# Altium PCB 5VV10 AND BUCK_v3_SKM.PcbDoc
Units mm, origin at the board's own origin, x right, y up, seen from the top; angles counter-clockwise.
Board outline 110 x 110 mm, 2 copper layers (Top Layer, Bottom Layer); 23 components, 22 nets, 89 pads, 12 vias.
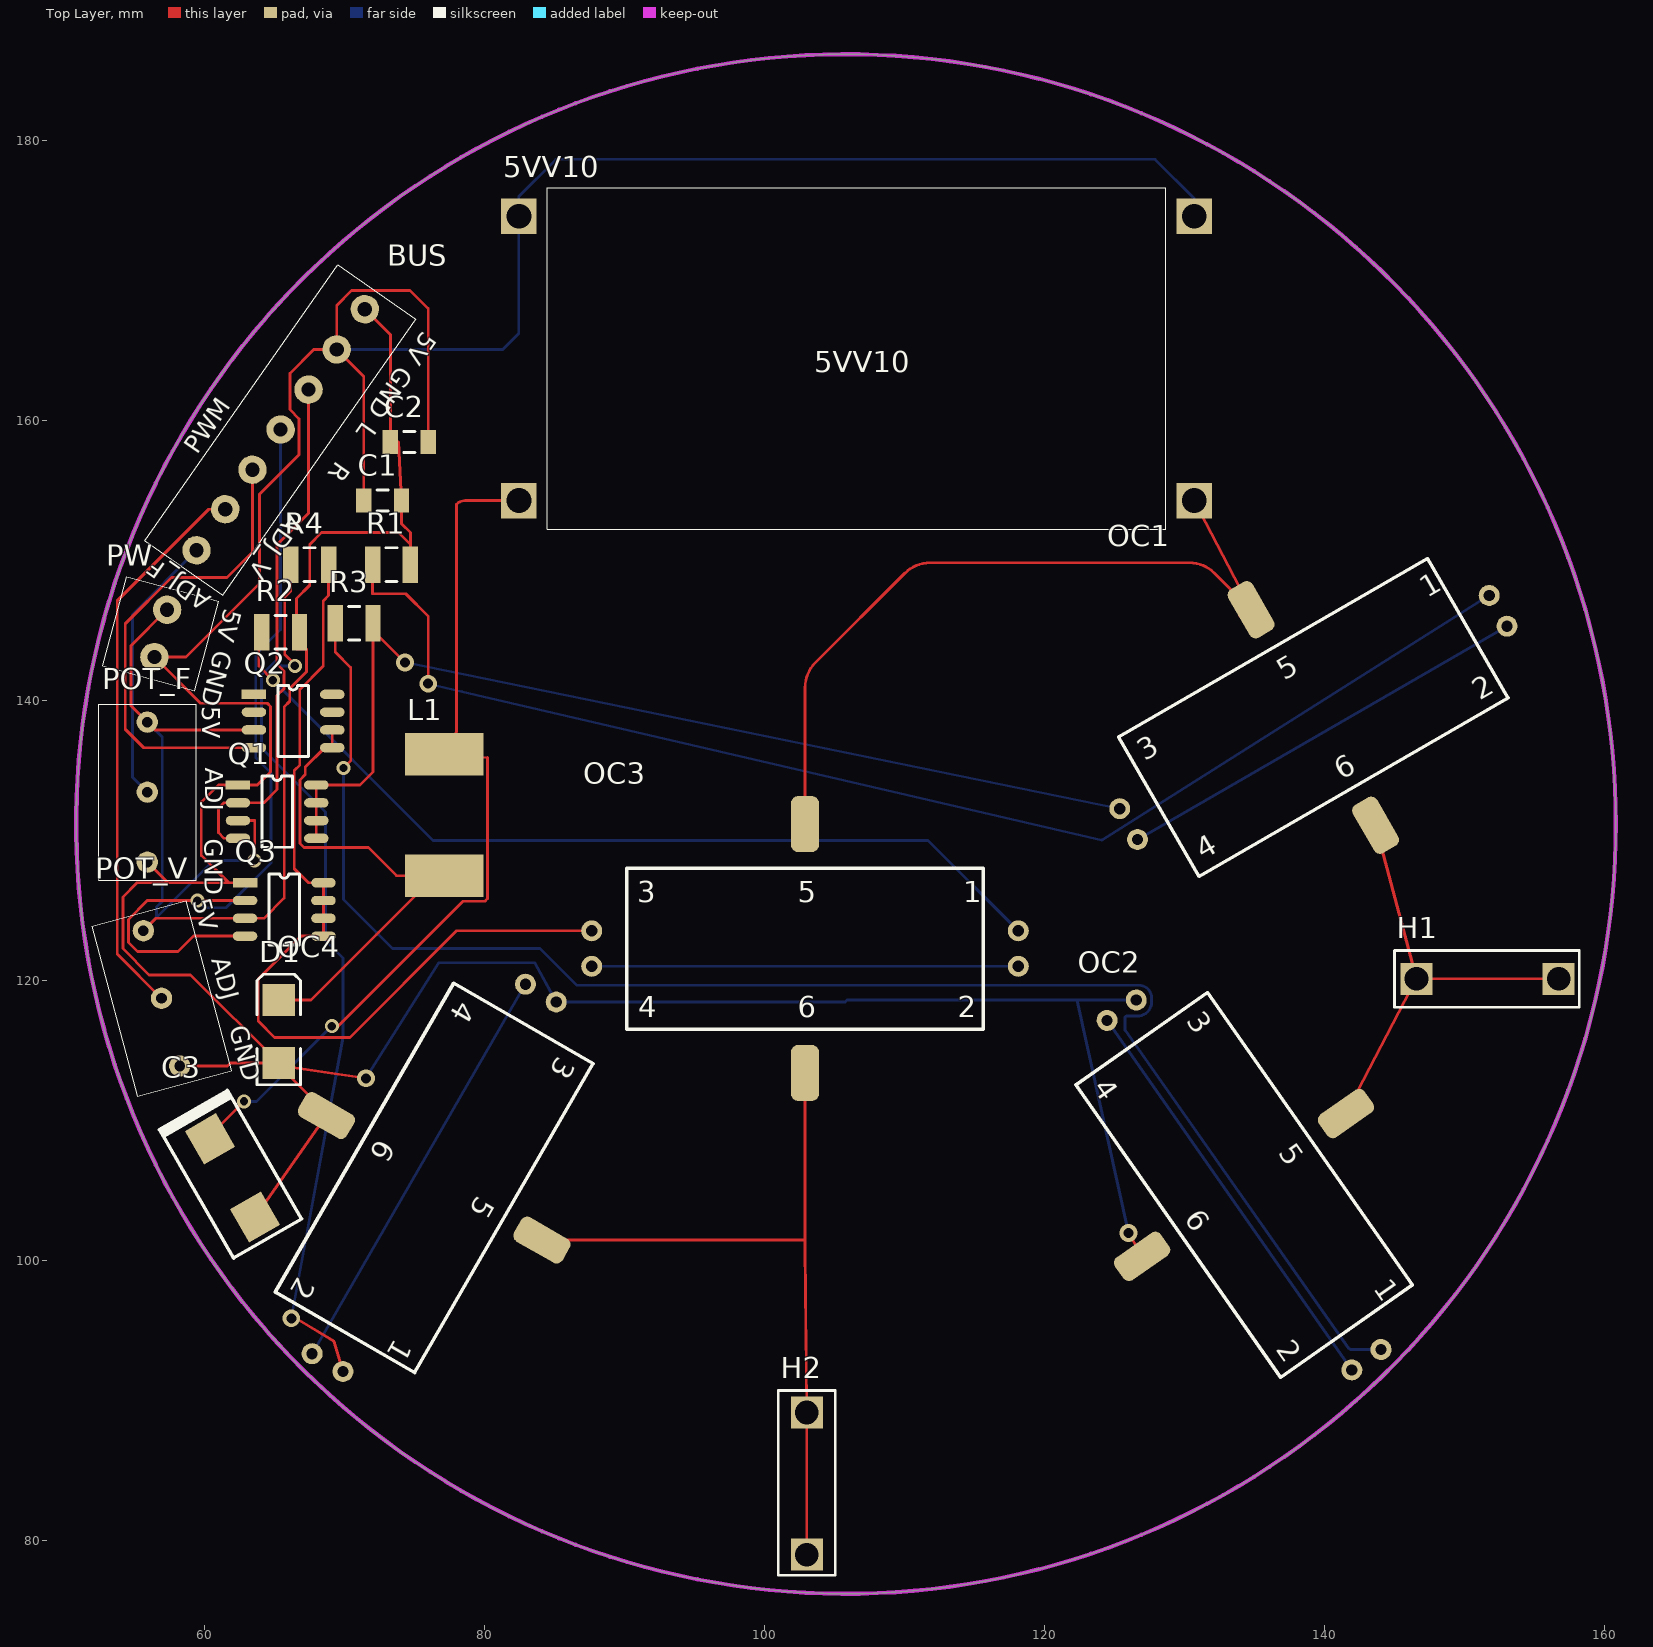
[diagram p0: Top Layer view]
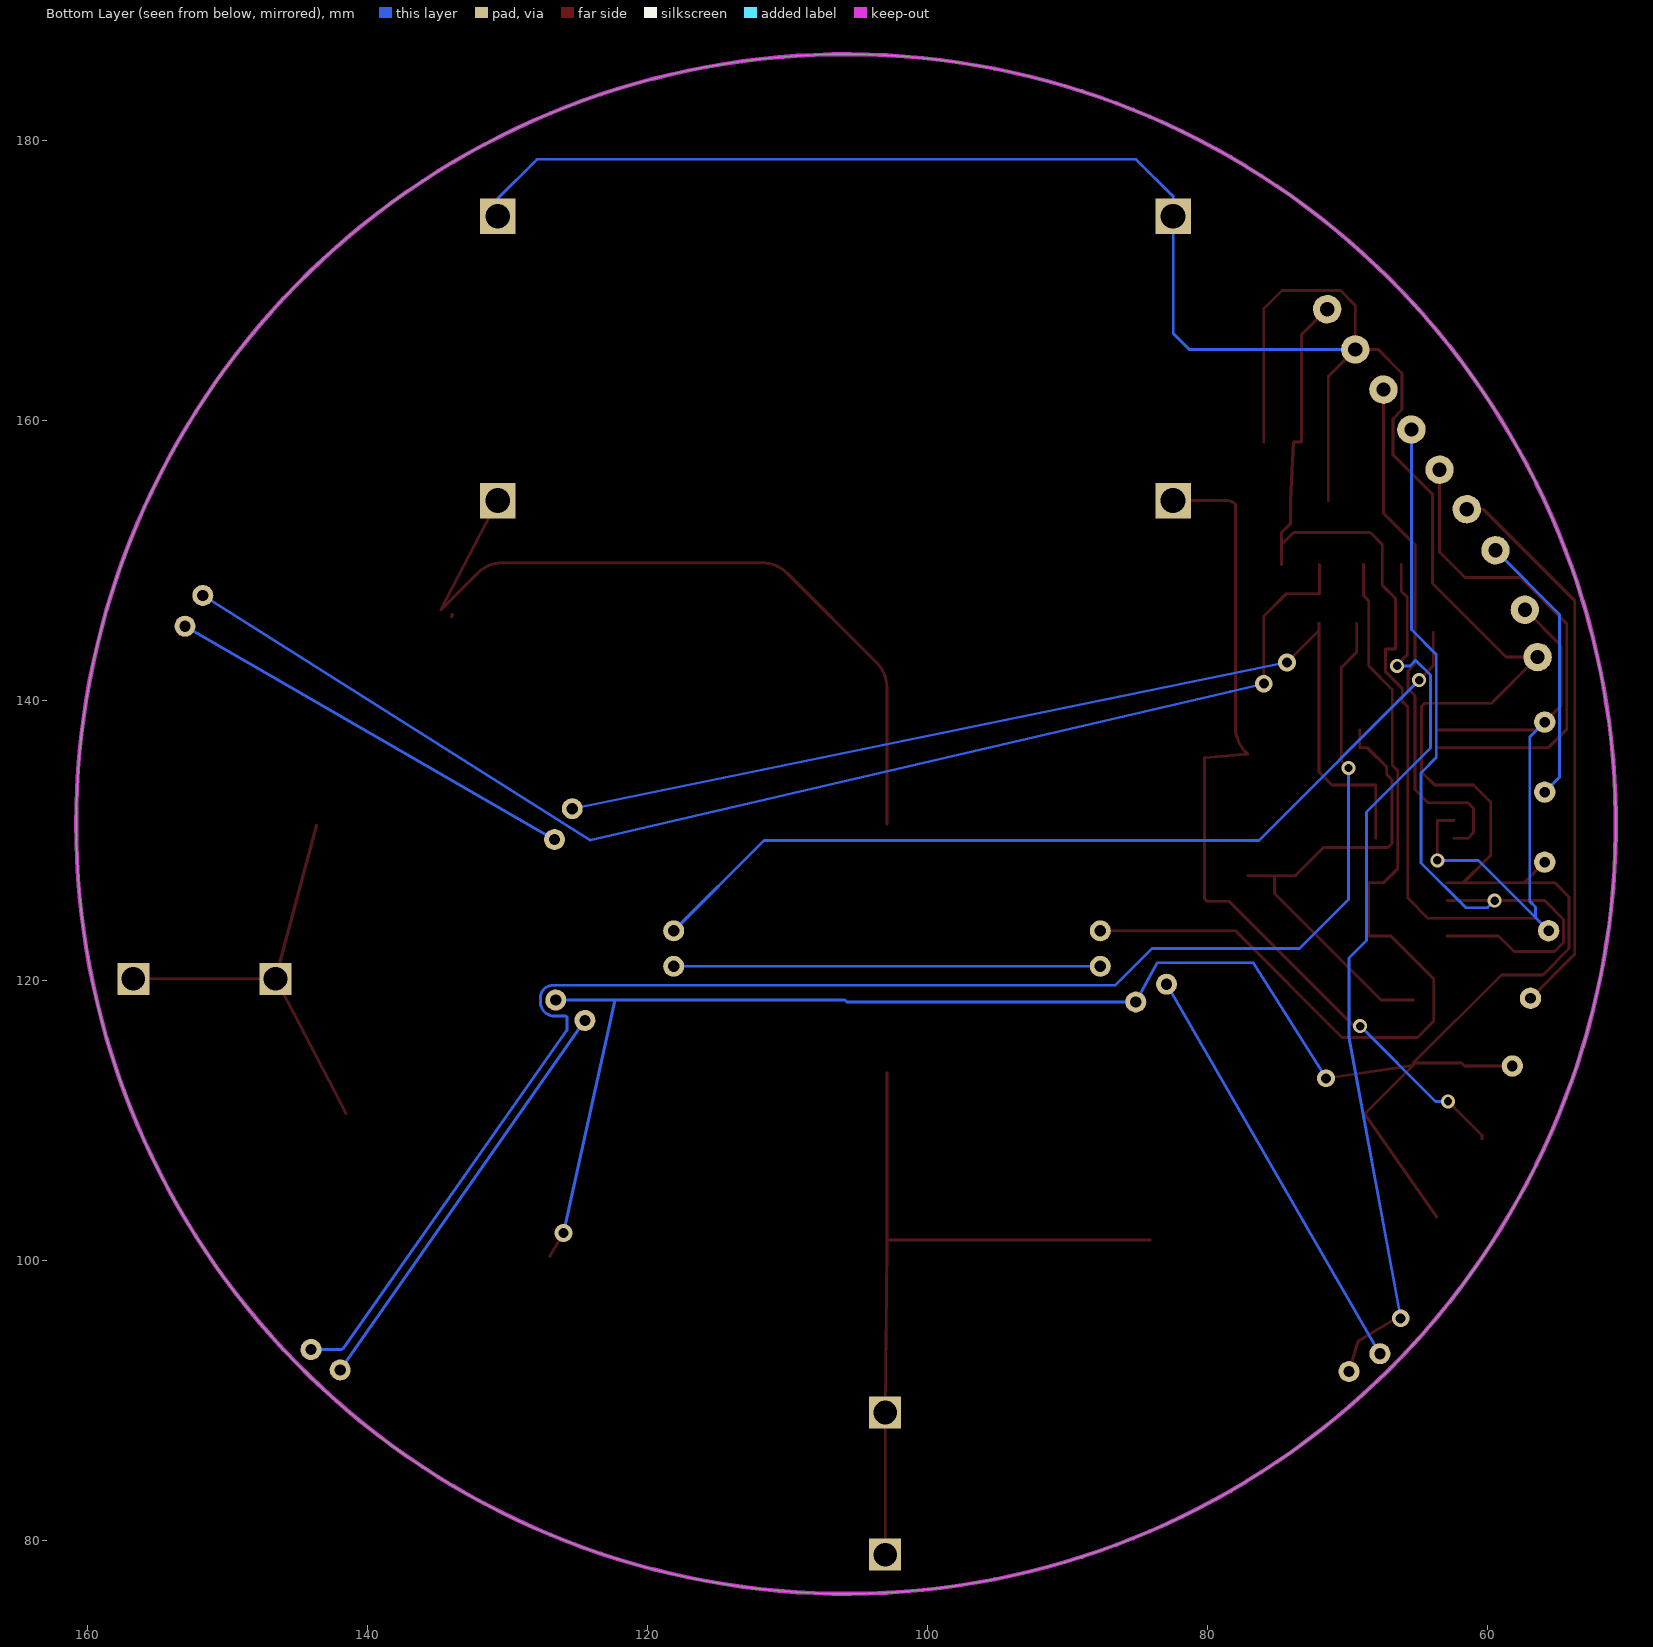
[diagram p1: Bottom Layer view, seen from below]

## Layer stack, top to bottom
Top Solder: solder mask 0.0102, Solder Resist, Dk 3.5
Top Layer: signal copper 0.0356
Dielectric 1: dielectric 0.32, FR-4, Dk 4.8
Bottom Layer: signal copper 0.0356
Bottom Solder: solder mask 0.0102, Solder Resist, Dk 3.5

## Board outline
160.8,131.2 ccw(c105.8,131.2) 105.8,186.2 ccw(c105.8,131.2) 50.8,131.2 ccw(c105.8,131.2) 105.8,76.2 ccw(c105.8,131.2) 160.8,131.2 ccw(c105.8,131.2)

## Design rules (kind name [scope] priority, off if disabled: settings)
Clearance [All] p1: gap=0.2 ignorepadtopadclearanceinfootprint=FALSE
PolygonConnect [All] p1: connectstyle=Relief reliefconductorwidth=0.254 reliefentries=4 polygonreliefangle="90 Angle" airgapwidth=0.254
RoutingVias [All] p1: holewidth=0.6 width=1 viastyle="Through Hole" minholewidth=0.711 minwidth=1.27 maxholewidth=0.711 maxwidth=1.27
SolderMaskExpansion [All] p1: expansion=0.102
Width [All] p1: maxlimit=0.2 minlimit=0.2 preferedwidth=0.2
30 further rules are at their usual default settings.

## Classes and differential pairs
component class "5VV10 AND BUCK_v2": 5VV10 BUS C1 C2 C3 D1 H1 H2 L1 OC3 OC4 POT_F POT_V PW Q1 Q2 Q3 R1 R2 R3 R4

## Components (designator, comment, footprint, x,y, rotation, side; value= is the part's Value field where it differs from the comment)
5VV10 "5VV10" PCBComponent_1#1 82.423,174.625 r270 top
BUS "BUS" WJ350_7_Pins 71.422,167.978 r145 top
C1 "Cap Semi" C1206 72.691,154.305 r0 top value=100pF
C2 "Cap Semi" C1206 74.596,158.496 r0 top value=100pF
C3 "Capacitor 220uF (Polarized)" "SMD 7343 - Pol" 61.976,105.918 r120 top value=220uF
D1 "D Schottky" SMB 65.278,116.368 r90 top
H1 "2mm Banana" PCBComponent_1#2 156.718,120.142 r90 top
H2 "2mm Banana" PCBComponent_1#2 102.997,78.994 r0 top
L1 "Inductor" PCBComponent_1#3 77.089,127.508 r0 top value=820uH
OC1 "Optocoupler" OC100G 139.192,138.811 r120 top
OC2 "Optocoupler" OC100G 134.239,105.41 r35 top
OC3 "Optocoupler" OC100G 102.87,122.301 r90 top
OC4 "Optocoupler" OC100G 76.375,105.918 r330 top
POT_F "POT" WJ350_3_Pins 55.88,138.481 r180 top
POT_V "POT" WJ350_3_Pins 55.601,123.578 r195 top
PW "PW" WJ350_2_Pins 57.295,146.515 r165 top
Q1 "Dual MOSFET" SO-8 62.357,133.985 r0 top
Q2 "Dual MOSFET" SO-8 63.5,140.462 r0 top
Q3 "Dual MOSFET" SO-8 62.865,127 r0 top
R1 "Res3" 14-1210 73.326,149.733 r0 top value=27
R2 "Res3" 14-1210 65.405,144.907 r0 top value=27
R3 "Res3" 14-1210 70.659,145.542 r0 top value=27
R4 "Res3" 14-1210 67.484,149.733 r0 top value=27

## Footprints (in the part's own frame and the unit in brackets; to place one, negate y for a bottom-side part, rotate by r counter-clockwise, add the part's x,y. Pads: shape width x height; smd on the part's side, far side on the other; paste and mask are expansions set on the pad)
14-1210 [mm] "Chip Resistor, Body 3.2x2.5mm, IPC High Density"
  rect 1.1x2.6 smd: 1(-1.35,0) 2(1.35,0)
  silkscreen extent -0.4,-1.2 0.4,1.2, body extent -1.68,-1.32 1.68,1.32, height 0.9
C1206 [mm] "Chip Capacitor, Body 3.2x1.6mm, IPC High Density"
  rect 1.1x1.7 smd: 1(-1.35,0) 2(1.35,0)
  silkscreen extent -0.4,-0.75 0.4,0.75, body extent -1.7,-0.9 1.7,0.9, height 1.3
OC100G [mm]
  round 1.5 hole 0.8: 1(1.27,-15.24) 2(-1.27,-15.24) 3(1.27,15.24) 4(-1.27,15.24)
  rrect50% 4x2 smd: 5(8.89,0) 6(-8.89,0)
  silkscreen extent -5.75,-12.75 5.75,12.75
PCBComponent_1#1 [mil]
  rect 100x100 hole 70: 1(0,0) 2(800,0) 3(800,1900) 4(0,1900)
  silkscreen extent -80,80 880,1820
PCBComponent_1#2 [mil]
  rect 90x90 hole 67: 1(0,400) 1(0,0)
  silkscreen extent -80,-58 80,462
PCBComponent_1#3 [mil]
  rect 220x120 smd: 1(0,0) 2(0,342)
SMB [mm] "DO-214-AA/SMB; 2 C-Bend Leads; Body 5.3 x 3.6 mm, inc. leads (LxW)"
  rect 2.3x2.3 smd: 1(-2.25,0) 2(2.25,0)
  silkscreen extent -3.8,-1.55 4.1,1.55
"SMD 7343 - Pol" [mm]
  rect 2.77x2.55 smd: 1(3.22,0) 2(-3.22,0)
  silkscreen extent -5,-2.8 5.6,2.8
SO-8 [mm]
  rect 1.75x0.67 smd: 1(0,0)
  oval 1.75x0.67 smd: 2(0,-1.27) 3(0,-2.54) 4(0,-3.81) 5(5.6,-3.81) 6(5.6,-2.54) 7(5.6,-1.27) 8(5.6,0)
  silkscreen extent 1.71,-4.44 3.89,0.64
WJ350_2_Pins [mil]
  round 80 hole 40: P1(0,0) P2(0,138)
  silkscreen extent -134,-60 134,200
WJ350_3_Pins [mil]
  round 60 hole 30: P1(0,0) P2(0,197) P3(0,394)
  silkscreen extent -137,-50 137,445
WJ350_7_Pins [mil]
  round 80 hole 40: P1(0,0) P2(0,138) P3(0,276) P4(0,413) P5(0,551) P6(-1,686) P7(-1,827)
  silkscreen extent -134,-59 134,889

## Part data
BUS: library part WJ350_6_Pins
C1 C2: "Capacitor (Semiconductor SIM Model)", LatestRevisionDate=29-May-2009, LatestRevisionNote="IPC-7351 Footprint Added.", PackageDescription="Chip Capacitor", PackageReference=C1206, Published=8-Jun-2000, Publisher="Altium Limited"
D1: "Schottky Diode", Code_JEDEC=DO-214-AA, LatestRevisionDate=17-Jul-2002, LatestRevisionNote="Re-released for DXP Platform.", PackageDescription="DO-214-AA/SMB; 2 C-Bend Leads; Body 5.3 x 3.6 mm, inc. leads (LxW)", PackageReference=SMB, Published=8-Jun-2000, Publisher="Altium Limited"
L1: library part 820u
OC1 OC2 OC3 OC4: "Manufacturer OC100G MPI distribution OC100G"
POT_F POT_V: library part WJ350_3_Pins
PW: library part WJ350_2_Pins
Q1 Q2 Q3: "Manufacturer FDS8858CZ Farnell 1498963"
R1 R2 R3 R4: "Resistor", LatestRevisionDate=29-May-2009, LatestRevisionNote="IPC-7351 Footprint Added.", PackageDescription="Chip Resistor", PackageReference=J1-0603, Published=8-Jun-2000, Publisher="Altium Limited"
5VV10: Mnf="Pico Electronics"
C3: LatestRevisionDate=17-Jul-2002, LatestRevisionNote="Re-released for DXP Platform.", PackageDescription="Polarized Capacitor (Radial); 2 Leads", PackageReference=RB7.6-15, Published=8-Jun-2000, Publisher="Altium Limited"

## Via types
v1: diameter 1, hole 0.6, Top Layer to Bottom Layer, 7 vias
v2: diameter 1.27, hole 0.711, Top Layer to Bottom Layer, 5 vias

## Nets (pads, with @x,y where several pads share a name; then routed paths per layer and width w, separated by ;. In a path a pad name is that pad's centre, name@x,y a point inside that pad or via, vN(x,y) a via of type N, cw(c..) or ccw(c..) an arc to the next point about the centre after c; other vN are vias at no path point)
5V: BUS.P1 C1.2 C2.1 POT_F.P1 POT_V.P1 PW.P1 Q1.3 Q2.3 Q3.3 R1.2 R2.2 | length 111.9
  Top Layer w0.2: POT_V.P1 56.483,124.46 Q3.3 64.211,124.46 65.659,125.908 65.659,139.572 66.055,139.969 66.055,140.887 67.246,142.078 67.246,143.707 66.548,143.707 66.548,147.32 67.488,148.26 67.488,151.181 68.326,152.019 73.838,152.019 74.676,151.181 ; PW.P1 54.712,143.931 54.712,139.649 POT_F.P1 56.439,137.922 Q2.3 ; Q1.3 63.551,131.445 v1(63.551,128.6) ; BUS.P1 73.246,166.154 C2.1 73.838,158.496 C1.2 74.041,152.654 74.676,152.019 74.676,151.181 ; R1.2 74.676,151.181
  Bottom Layer w0.2: POT_V.P1 56.53,124.507 ; POT_F.P1 56.947,137.414 56.947,125.678 56.53,125.261 56.53,124.507 ; v1(63.551,128.6) 60.623,128.6 56.53,124.507
ADJ_F: BUS.P7 POT_F.P2 | length 19.6
  Bottom Layer w0.2: POT_F.P2 54.813,134.544 54.813,146.175 BUS.P7
ADJ_V: BUS.P6 POT_V.P2 | length 40.1
  Top Layer w0.2: POT_V.P2 53.734,121.907 53.734,147.155 60.269,153.69 BUS.P6
GND: 5VV10.1 5VV10.4 BUS.P2 C1.1 C2.2 C3.2 D1.1 OC2.3 OC2.6 OC4.3 OC4.6 POT_F.P3 POT_V.P3 PW.P2 Q1.1 Q3.1 | length 301.1
  Top Layer w0.2: POT_F.P3 57.353,127 ; POT_V.P3 61.62,113.912 61.827,114.118 D1.1 ; Q3.1 61.697,127 ; C3.2 OC4.6 68.676,110.541 D1.1@65.278,113.939 ; C1.1 71.341,163.177 BUS.P2 ; v2(71.501,113.03) D1.1@65.278,113.939 ; C2.2 75.946,168.021 74.651,169.316 70.478,169.316 69.411,168.25 BUS.P2 ; v2(125.984,101.981) OC2.6 ; 57.353,127 61.697,127 ; 57.353,127 55.15,127 54.134,125.984 54.134,122.301 56.013,120.421 58.975,120.421 D1.1 ; 61.697,127 59.741,128.956 59.741,132.766 60.96,133.985 Q1.1 63.735,133.985 64.675,134.925 64.675,139.598 64.446,139.827 59.69,139.827 PW.P2 58.649,143.129 63.906,148.387 63.906,154.762 66.726,157.582 66.726,160.147 66.065,160.807 66.065,163.398 67.774,165.107 BUS.P2 ; D1.1@65.278,113.939 D1.1
  Bottom Layer w0.2: BUS.P2 81.28,165.107 82.423,166.25 5VV10.1 82.423,176.022 85.09,178.689 127.889,178.689 130.683,175.895 5VV10.4 ; v2(71.501,113.03) 76.708,121.285 83.566,121.285 OC4.3 105.74,118.481 105.881,118.622 122.301,118.622 ; v2(125.984,101.981) 122.301,118.622 ; OC2.3 122.301,118.622
HV: 5VV10.3 OC1.5 OC3.5 | length 56
  Top Layer w0.2: OC3.5 102.87,140.934 cw(c105.41,140.934) 103.614,142.73 110,149.116 cw(c111.796,147.32) 111.796,149.86 130.345,149.86 cw(c130.345,147.32) 132.141,149.116 OC1.5 5VV10.3 ; OC1.5@133.915,146.179 OC1.5@133.985,146.002
LEFT: BUS.P3 Q1.2 Q1.4 | length 38
  Top Layer w0.2: Q1.4 61.366,130.175 60.96,130.581 60.96,132.309 61.366,132.715 Q1.2 64.211,132.715 65.151,133.655 65.151,140.369 65.646,140.864 65.646,142.137 65.151,142.633 65.151,151.155 67.401,153.405 BUS.P3
Net5VV10_2: 5VV10.2 C3.1 L1.2 | length 62.9
  Top Layer w0.2: C3.1 60.366,108.956 v1(62.789,111.379) ; v1(69.063,116.764) 69.52,116.764 78.44,125.684 80.007,125.684 80.188,125.865 80.188,135.941 L1.2 77.234,136.34 ccw(c75.438,138.136) 77.978,138.136 77.978,154.051 cw(c78.591,153.438) 78.591,154.305 5VV10.2
  Bottom Layer w0.2: v1(62.789,111.379) 63.678,111.379 v1(69.063,116.764)
NetD1_2: D1.2 L1.1 Q2.5 Q2.6 | length 35
  Top Layer w0.2: D1.2 67.564,118.618 75.184,126.238 L1.1@75.184,127.508 ; Q2.6 Q2.5 68.555,136.652 67.158,135.255 67.158,134.722 66.782,134.346 66.782,129.814 67.081,129.515 71.679,129.515 73.685,127.508 L1.1@75.184,127.508 ; L1.1 L1.1@75.184,127.508
NetH1_1: H1.1 OC1.6 OC2.5 | length 32.4
  Top Layer w0.2: OC2.5 H1.1@146.558,120.142 ; OC1.6 H1.1@146.558,120.142 ; H1.1@156.718,120.142 H1.1@146.558,120.142
NetH2_1: H2.1 OC3.6 OC4.5 | length 54
  Top Layer w0.2: OC4.5 102.87,101.473 ; OC3.6 102.87,101.473 ; H2.1@102.997,78.232 102.997,78.994 102.997,89.154 102.87,101.041 102.87,101.473
NetOC1_1: OC1.1 R1.1 | length 93.7
  Top Layer w0.2: R1.1 71.976,147.65 74.346,147.65 75.946,146.05 v2(75.946,141.224)
  Bottom Layer w0.2: v2(75.946,141.224) 78.359,140.657 124.079,130.048 OC1.1 OC1.1@151.755,147.549
NetOC1_2: OC1.2 OC1.4 | length 30.5
  Bottom Layer w0.2: OC1.4 OC1.2
NetOC1_3: OC1.3 Q1.5 Q1.6 Q1.7 Q1.8 R3.2 | length 74.2
  Top Layer w0.2: Q1.5 Q1.6 Q1.7 Q1.8 71.069,133.985 72.009,134.925 R3.2@72.009,145.034 ; R3.2 R3.2@72.009,145.034 ; v2(74.295,142.748) R3.2@72.009,145.034
  Bottom Layer w0.2: v2(74.295,142.748) OC1.3
NetOC2_1: OC2.1 R3.1 | length 115
  Top Layer w0.2: R3.1 69.309,143.485 70.409,142.385 70.409,135.712 v1(69.901,135.204)
  Bottom Layer w0.2: v1(69.901,135.204) 69.901,125.806 73.406,122.301 83.947,122.301 86.576,119.672 126.746,119.672 cw(c126.746,118.783) 127.635,118.783 127.635,118.491 cw(c126.619,118.491) 126.619,117.475 125.857,117.475 ccw(c125.857,117.348) 125.73,117.348 cw(c125.704,117.322) 125.741,117.322 125.741,116.47 141.732,93.726 ccw(c141.904,93.898) 141.904,93.655 OC2.1
NetOC2_2: OC2.2 OC2.4 | length 30.5
  Bottom Layer w0.2: OC2.4 OC2.2
NetOC3_1: OC3.1 R2.1 | length 64.5
  Top Layer w0.2: R2.1@63.848,144.907 63.848,142.476 v1(64.846,141.478)
  Bottom Layer w0.2: v1(64.846,141.478) 76.302,130.023 111.658,130.023 OC3.1
NetOC3_2: OC3.2 OC3.4 | length 30.5
  Bottom Layer w0.2: OC3.4 OC3.2
NetOC3_3: OC3.3 Q3.5 Q3.6 Q3.7 Q3.8 R4.2 | length 65.4
  Top Layer w0.2: R4.2 68.834,147.523 68.453,147.142 68.453,142.498 66.777,140.822 66.777,135.415 66.382,135.02 66.382,128.004 67.386,127 Q3.8 Q3.7 Q3.6 Q3.5 66.878,123.19 63.805,120.117 63.805,117.119 64.971,115.953 70.36,115.953 77.978,123.571 OC3.3
NetOC4_1: OC4.1 R4.1 | length 65.3
  Top Layer w0.2: R4.1 66.134,147.853 65.698,147.417 65.698,143.307 66.421,142.584 v1(66.421,142.494) ; v2(66.167,95.885) 66.294,96.012 69.215,94.234 OC4.1
  Bottom Layer w0.2: v2(66.167,95.885) 69.855,115.956 69.863,115.964 69.863,121.628 68.605,122.885 68.605,132.055 64.033,136.627 64.033,141.834 65.1,142.9 65.507,142.494 v1(66.421,142.494)
NetOC4_2: OC4.2 OC4.4 | length 30.5
  Bottom Layer w0.2: OC4.2 OC4.4
PWM: BUS.P5 Q2.4 | length 34.4
  Top Layer w0.2: BUS.P5 63.394,150.622 61.583,148.81 57.608,148.81 54.305,145.508 54.305,137.973 55.626,136.652 Q2.4
RIGHT: BUS.P4 Q3.2 Q3.4 | length 58.5
  Top Layer w0.2: Q3.4 59.182,123.19 58.076,122.084 55.183,122.084 54.534,122.733 54.534,124.384 55.88,125.73 v1(59.461,125.73) Q3.2
  Bottom Layer w0.2: v1(59.461,125.73) 59.969,125.222 61.519,125.222 64.719,128.422 64.719,134.849 63.627,135.941 63.627,143.307 65.405,145.085 BUS.P4
pads on no net: Q2.1 Q2.2 Q2.7 Q2.8

## Keep-outs
Keep-Out Layer:
  circle w0.3: c105.8,131.2 r55

## Silkscreen, mask and mechanical layers (free items; w line width, h text height)
Drill Drawing:
  text ".LEGEND" at 165.88,81.28 h1.52
  text "Drill Drawing." at 165.88,78.74 h1.52

## Dimensions
160.8,131.2 to 50.8,131.2 on Mechanical 1

## Text inside footprints (layer, text, board x,y; h text height)
BUS: Top Overlay "ADJ_F" at 60.515,147.398 h1.27 r145; Top Overlay "5V" at 75.608,166.473 h1.27 r235; Top Overlay "GND" at 73.889,164.018 h1.27 r235; Top Overlay "L" at 71.296,160.004 h1.27 r235; Top Overlay "R" at 69.406,157.172 h1.27 r235; Top Overlay "PWM" at 59.437,157.548 h1.27 r55.34; Top Overlay "ADJ_V" at 66.01,153.473 h1.27 r235
OC1: Top Overlay "4" at 131.336,128.617 h1.52 r30; Top Overlay "3" at 127.15,135.669 h1.52 r30; Top Overlay "6" at 141.209,134.317 h1.52 r30; Top Overlay "5" at 137.109,141.419 h1.52 r30; Top Overlay "2" at 151.082,140.017 h1.52 r30; Top Overlay "1" at 147.328,147.319 h1.52 r30
OC2: Top Overlay "4" at 123.4,112.347 h1.52 r305; Top Overlay "3" at 130.059,117.133 h1.52 r305; Top Overlay "6" at 129.938,103.009 h1.52 r305; Top Overlay "5" at 136.655,107.712 h1.52 r305; Top Overlay "2" at 136.477,93.671 h1.52 r305; Top Overlay "1" at 143.424,98.046 h1.52 r305
OC3: Top Overlay "4" at 90.97,117.401 h1.52; Top Overlay "3" at 90.87,125.601 h1.52; Top Overlay "6" at 102.37,117.401 h1.52; Top Overlay "5" at 102.37,125.601 h1.52; Top Overlay "2" at 113.77,117.401 h1.52; Top Overlay "1" at 114.17,125.601 h1.52
OC4: Top Overlay "4" at 78.082,118.674 h1.52 r240; Top Overlay "3" at 85.233,114.66 h1.52 r240; Top Overlay "6" at 72.382,108.801 h1.52 r240; Top Overlay "5" at 79.483,104.701 h1.52 r240; Top Overlay "2" at 66.681,98.928 h1.52 r240; Top Overlay "1" at 73.583,94.482 h1.52 r240
POT_F: Top Overlay "ADJ" at 60.02,135.23 h1.27 r270; Top Overlay "GND" at 59.995,130.15 h1.27 r270; Top Overlay "5V" at 59.817,139.598 h1.27 r270
POT_V: Top Overlay "ADJ" at 60.442,121.509 h1.27 r285; Top Overlay "GND" at 61.732,116.596 h1.27 r285; Top Overlay "5V" at 59.115,125.677 h1.27 r285
PW: Top Overlay "5V" at 61.407,146.649 h1.27 r255; Top Overlay "GND" at 60.741,143.672 h1.27 r255